# Altium PCB 底板模版.PcbDoc
Units mm, origin at the board's own origin, x right, y up, seen from the top; angles counter-clockwise.
Board outline 122.4 x 87.4 mm, 2 copper layers (Top Layer, Bottom Layer); 29 components, 112 nets, 147 pads, 9 vias.
Unrouted connection lines stored in the file: 38.
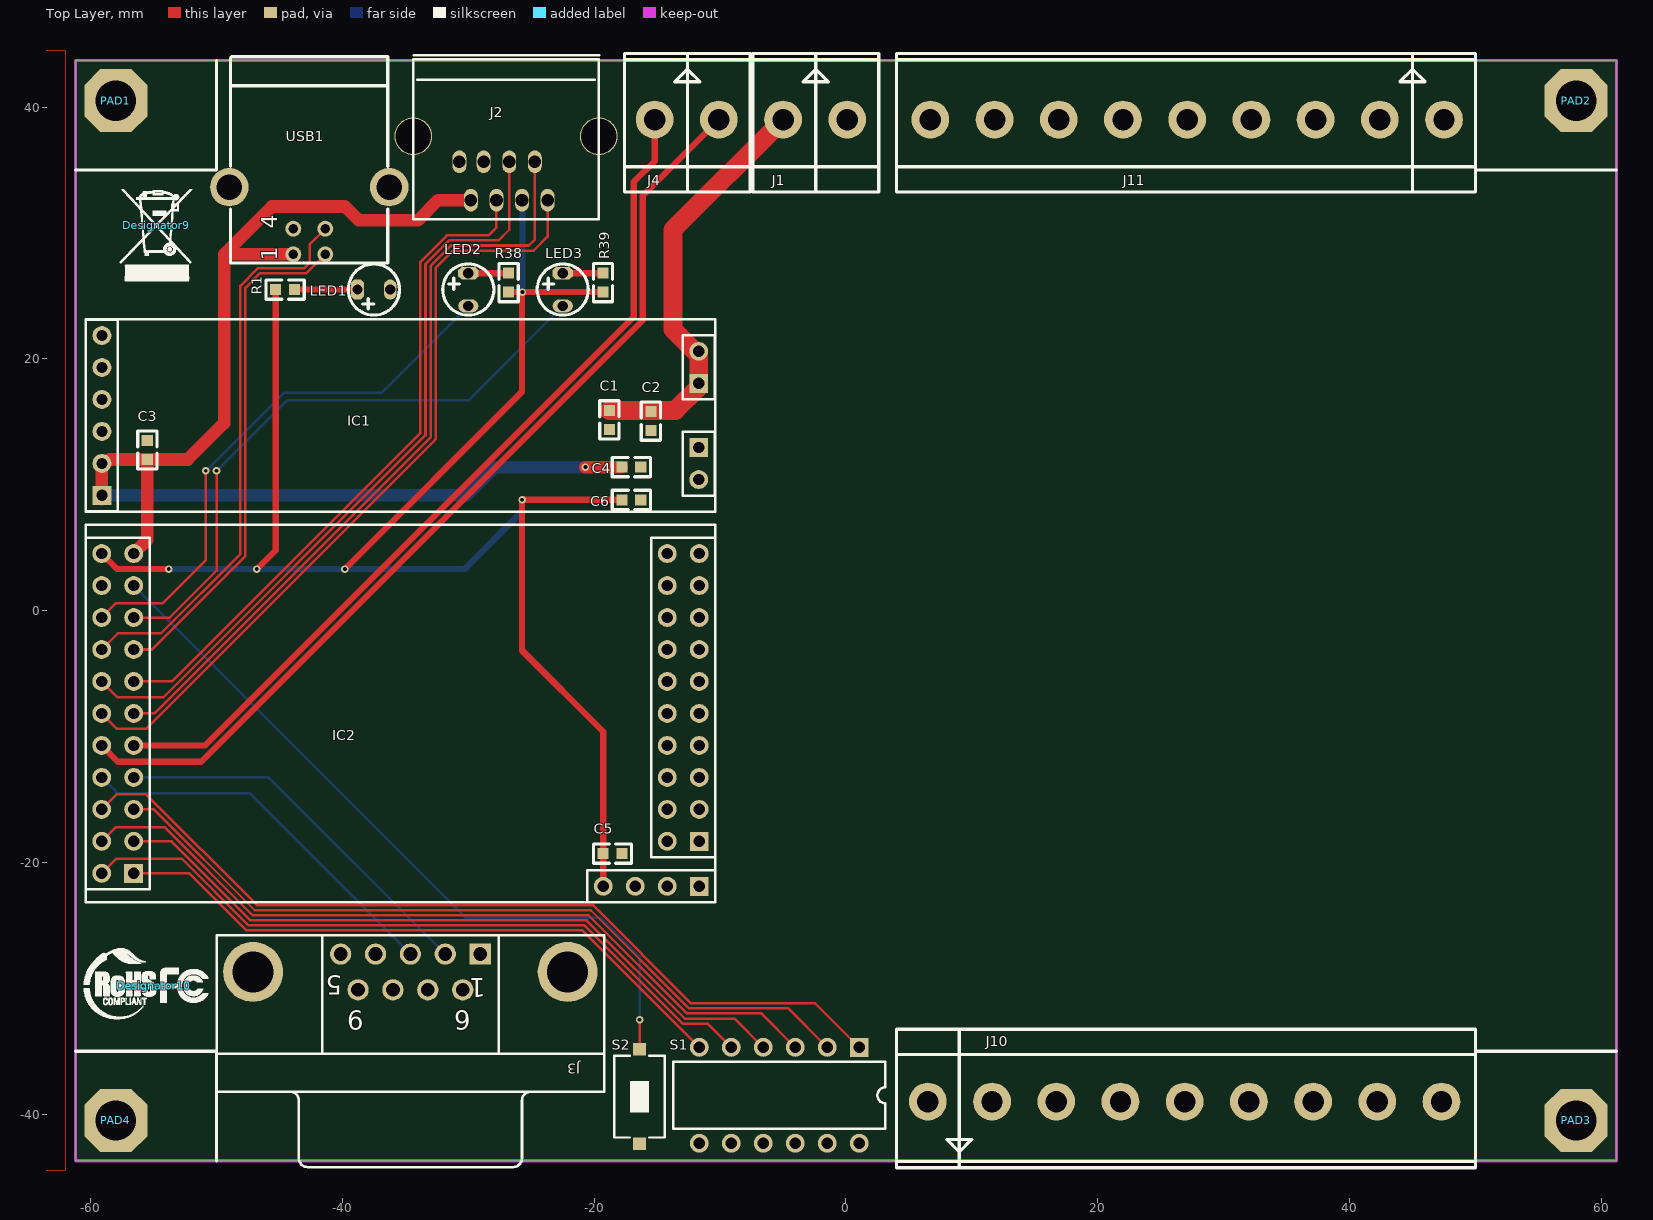
[diagram p0: Top Layer view]
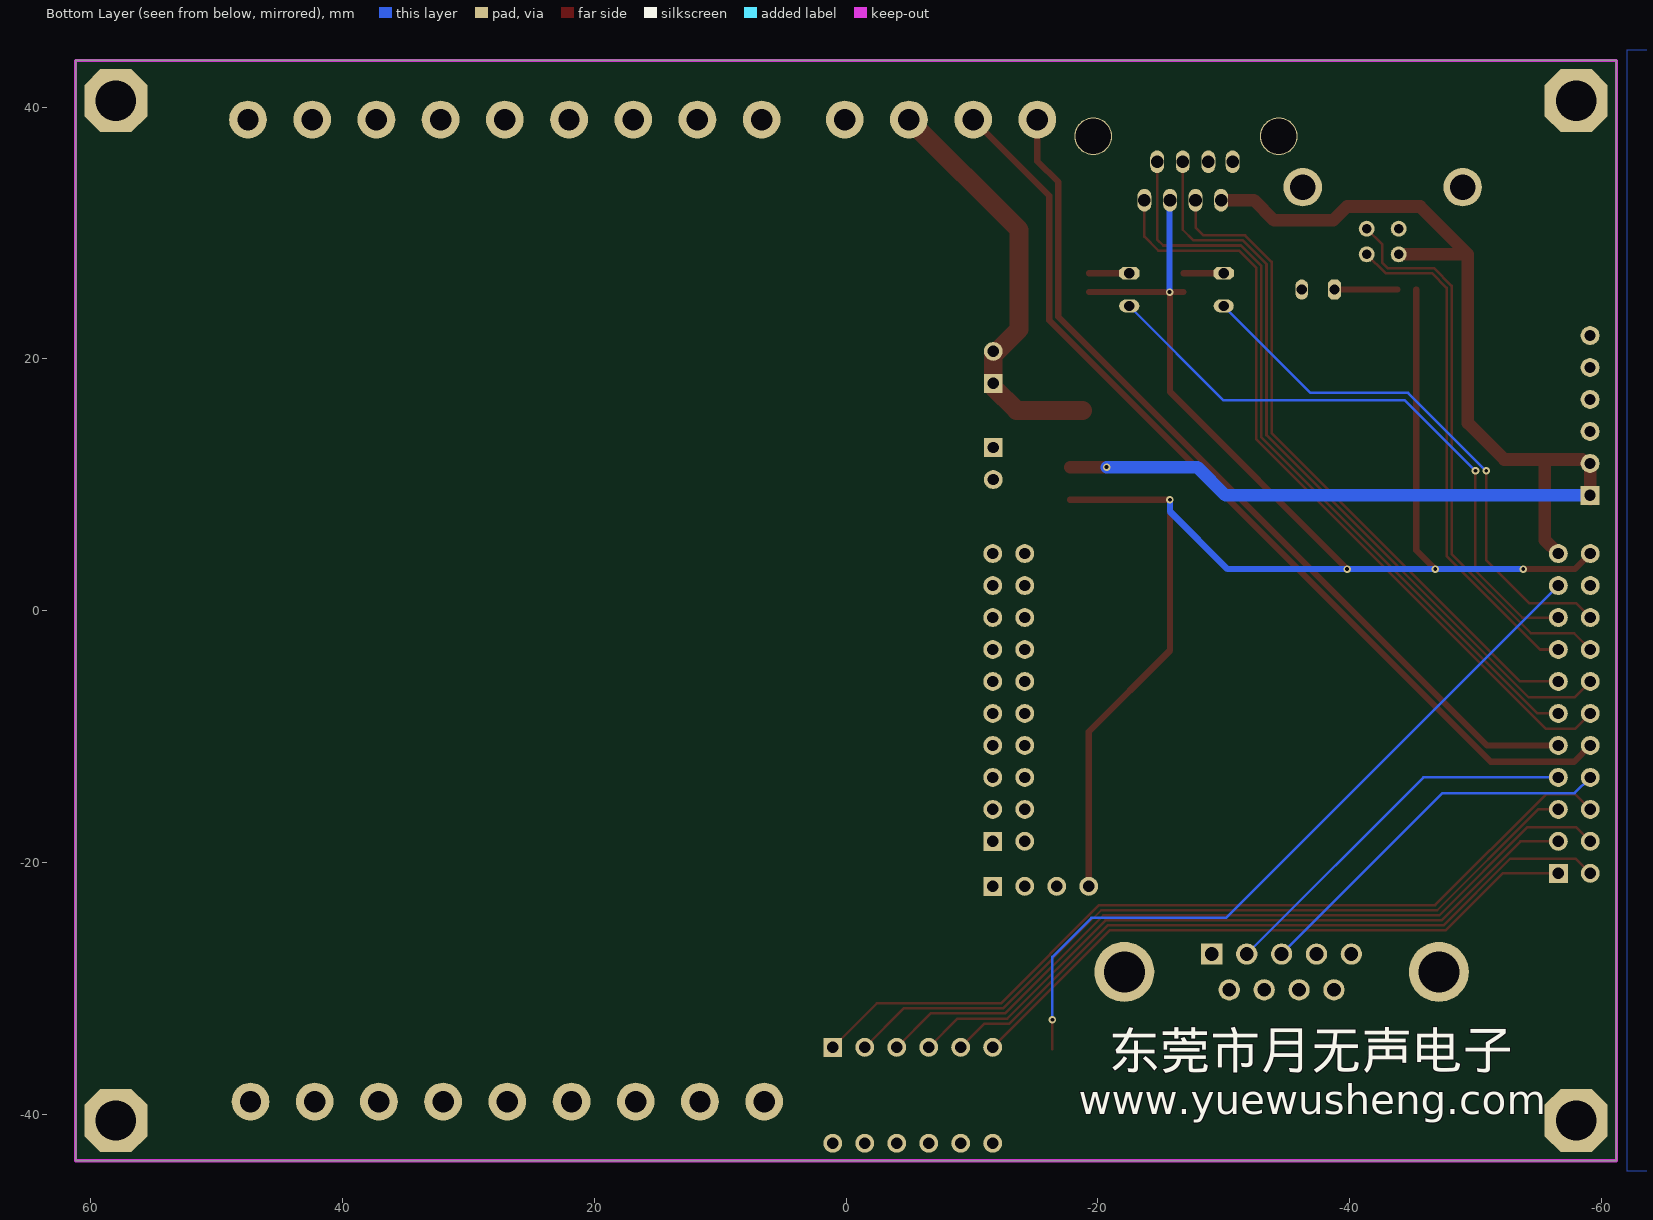
[diagram p1: Bottom Layer view, seen from below]

## Layer stack, top to bottom
Top Layer: signal copper 0.0356
Dielectric: dielectric 0.32, FR-4, Dk 4.8
Bottom Layer: signal copper 0.0356

## Board outline
-61.2,-43.7 61.2,-43.7 61.2,43.7 -61.2,43.7

## Design rules (kind name [scope] priority, off if disabled: settings)
Clearance [(InPadClass('All Pads')) vs InPolygon] p1: gap=0.3
Clearance Clearance_1 [All] p2: gap=0.2
ComponentClearance [All] p1 off: gap=0.254 collisioncheckmode=3 verticalgap=0.254 showdistances=FALSE
PlaneConnect [All] p1: planeconnectstyle=Relief reliefexpansion=0 reliefentries=4 reliefconductorwidth=0.3 reliefairgap=0.508
PolygonConnect PolygonConnect_1 [All vs IsComponentPad] p1: connectstyle=Relief reliefconductorwidth=0.3 reliefentries=4 polygonreliefangle="90 Angle" airgapwidth=0.3
PolygonConnect [All] p2: connectstyle=Direct reliefconductorwidth=0.3 reliefentries=4 polygonreliefangle="90 Angle" airgapwidth=0.3
RoomDefinition 1、八进八出 [InComponentClass('1、八进八出')] p1: confinementstyle=ConfineIn formatcopy=TRUE lockcomponents=FALSE outline -12,23.5 -12,28 3.5,28 3.5,46.6 62,46.6 62,-46.8 3.5,-46.8 3.5,-28 -12,-28 -12,-23.5 -9,-23.5 -9,23.5
RoomDefinition 公共电路 [InComponentClass('公共电路')] p2: confinementstyle=ConfineIn formatcopy=TRUE lockcomponents=FALSE outline -62,-44.5 3.5,-44.5 3.5,-43.7 61.2,-43.7 61.2,43.7 50,43.7 50,35 61.2,35 61.2,-35 50,-35 50,-43.7 3.5,-43.7 3.5,-28 -12,-28 -12,-23.5 -9.5,-23.5 -9.5,23.5 -12,23.5 -12,28 3.5,28 3.5,44.5 -62,44.5
RoutingVias [All] p1: holewidth=0.3 width=0.6 viastyle="Through Hole" minholewidth=0.3 minwidth=0.6 maxholewidth=0.3 maxwidth=0.6
SolderMaskExpansion [All] p1: expansion=0.102
Width [All] p1: maxlimit=2 minlimit=0.16 preferedwidth=0.2 minimp=50.000000 maximp=50.000000 favimp=50.000000
26 further rules are at their usual default settings.

## Classes and differential pairs
component class 1、八进八出: J10 J11
component class 公共电路: C1 C2 C3 C4 C5 C6 Designator9 Designator10 IC1 IC2 J1 J2 J3 J4 LED1 LED2 LED3 PAD1 PAD2 PAD3 PAD4 R1 R38 R39 S1 S2 usb1

## Components (designator, comment, footprint, x,y, rotation, side; value= is the part's Value field where it differs from the comment)
C1 "104" 0603A -18.8,15.9 r270 top
C2 "104" 0603A -15.5,15.8 r270 top
C3 "104" 0603A -55.5,12 r90 top
C4 "104" 0603A -17.8,11.4 r0 top
C5 "104" 0603A -19.3,-19.3 r0 top
C6 "104" 0603A -17.8,8.8 r0 top
Designator9 "" HS -54.8,30.6 r0 top
Designator10 "" fc -55,-29.8 r0 top
IC1 "扩展模块电源板" 扩展模块电源板 -35.4,15.5 r180 top
IC2 "扩展模块核心板" 扩展模块核心板 -35.4,-8.2 r0 top
J1 "CON2" CON2*5.1 0.1,39 r0 top
J2 "CON8" "od-rj45 - duplicate" -23.7,32.6 r180 top
J3 "D Connector 9" DSUB1.385-2H9 -34.6,-38.2 r180 top
J4 "CON2" CON2*5.1 -10.1,39 r0 top
J10 "CON9" CON9*5.1 6.5,-39 r180 top
J11 "CON9" CON9*5.1 47.5,39 r0 top
LED1 "LED" LED2.5 -37.5,25.5 r180 top
LED2 "LED" LED2.5 -30,25.5 r90 top
LED3 "LED" LED2.5 -22.5,25.5 r90 top
PAD1 "PAD" PAD -58,40.5 r0 top
PAD2 "PAD" PAD 58,40.5 r0 top
PAD3 "PAD" PAD 58,-40.5 r0 top
PAD4 "PAD" PAD -58,-40.5 r0 top
R1 "160" 0603A -45.3,25.5 r0 top
R38 "160" 0603A -26.8,25.3 r90 top
R39 "160" 0603A -19.3,25.3 r90 top
S1 "SW DIP-6" DIP-12/SW -5.3,-38.5 r180 top
S2 "RESRT" SW-PB2 -16.4,-38.6 r270 top
USB1 "USB" USB-B3 -43.9,28.3 r90 top

## Footprints (in the part's own frame and the unit in brackets; to place one, negate y for a bottom-side part, rotate by r counter-clockwise, add the part's x,y. Pads: shape width x height; smd on the part's side, far side on the other; paste and mask are expansions set on the pad)
0603A [mm]
  rect 0.88x0.88 smd: 1(0,0) 2(1.5,0)
  silkscreen extent -0.76,-0.76 2.26,0.76
CON2*5.1 [mm]
  round 3 hole 1.7: 1(0,0) 2(-5.1,0)
  silkscreen extent -7.5,-5.75 2.5,5.25
CON9*5.1 [mm]
  round 3 hole 1.7: 1(0,0) 2(-5.1,0) 3(-10.2,0) 4(-15.3,0) 5(-20.4,0) 6(-25.5,0) 7(-30.6,0) 8(-35.7,0) 9(-40.8,0)
  silkscreen extent -43.5,-5.75 2.5,5.25
DIP-12/SW [mm] "DIP Switch; 12 Leads"
  rect 1.5x1.5 hole 0.9: 1(-6.35,-3.81)
  round 1.5 hole 0.9: 2(-3.81,-3.81) 3(-1.27,-3.81) 4(1.27,-3.81) 5(3.81,-3.81) 6(6.35,-3.81) 7(6.35,3.81) 8(3.81,3.81) 9(1.27,3.81) 10(-1.27,3.81) 11(-3.81,3.81) 12(-6.35,3.81)
  silkscreen extent -8.43,-2.65 8.41,2.65
DSUB1.385-2H9 [mm] "Connector; D Subminiature; 9 Position; Right Angle; Pitch 1.385 mm"
  rect 1.69x1.69 hole 1.09: 1(-5.54,-10.92)
  round 1.69 hole 1.09: 2(-2.77,-10.92) 3(0,-10.92) 4(2.77,-10.92) 5(5.54,-10.92) 6(-4.155,-8.08) 7(-1.385,-8.08) 8(1.385,-8.08) 9(4.155,-8.08)
  round 4.76 hole 3.26: 10(-12.495,-9.5) 11(12.495,-9.5)
  silkscreen extent -15.4,-12.4 15.4,6
fc [mm]
  silkscreen extent -5.53,-2.62 4.36,3
HS [mm]
  silkscreen extent -2.87,-4.39 2.87,2.87
LED2.5 [mil]
  oct 40x63 hole 32: A(51.18,0)
  oval 40x63 hole 32: K(-51.18,0)
  silkscreen extent -80,-80 80,80
"od-rj45 - duplicate" [mm]
  oval 1.1x1.8 hole 1: 1(0,0) 2(1.016,-3.048) 3(2.032,0) 4(3.048,-3.048) 5(4.064,0) 6(5.08,-3.048) 7(6.096,0) 8(7.012,-3.048)
  round 3 hole 2.8: 8(-4.064,-5.08) 8(10.668,-5.08)
  silkscreen extent -4.1,-11.53 10.67,1.52
PAD [mm]
  oct 5x5 hole 3.2: 1(0,0)
SW-PB2 [mm]
  rect 1x1 smd: 1(-3.75,0) 2(3.75,0)
  silkscreen extent -3.25,-2 3.25,2
USB-B3 [mil]
  round 50 hole 30: 1(0,0) 2(0,-100) 3(80,-100) 4(80,0)
  round 120 hole 80: 5(210,200) 6(210,-300)
  silkscreen extent -28,-295 618,197
扩展模块核心板 [mm]
  rect 1.5x1.5 hole 0.9: 1(-21.18,-12.67) 42(23.74,-10.13) 43(23.74,-13.7)
  round 1.5 hole 0.9: 2(-23.72,-12.67) 3(-21.18,-10.13) 4(-23.72,-10.13) 5(-21.18,-7.59) 6(-23.72,-7.59) 7(-21.18,-5.05) 8(-23.72,-5.05) 9(-21.18,-2.51) 10(-23.72,-2.51) 11(-21.18,0.03) 12(-23.72,0.03) 13(-21.18,2.57) 14(-23.72,2.57) 15(-21.18,5.11) 16(-23.72,5.11) 17(-21.18,7.65) 18(-23.72,7.65) 19(-21.18,10.19) 20(-23.72,10.19) 21(-21.18,12.73) 22(-23.72,12.73) 23(21.2,12.73) 24(23.74,12.73) 25(21.2,10.19) 26(23.74,10.19) 27(21.2,7.65) 28(23.74,7.65) 29(21.2,5.11) 30(23.74,5.11) 31(21.2,2.57) 32(23.74,2.57) 33(21.2,0.03) 34(23.74,0.03) 35(21.2,-2.51) 36(23.74,-2.51) 37(21.2,-5.05) 38(23.74,-5.05) 39(21.2,-7.59) 40(23.74,-7.59) 41(21.2,-10.13) 44(21.2,-13.7) 45(18.66,-13.7) 46(16.12,-13.7)
  silkscreen extent -24.99,-14.97 25.01,15.03
扩展模块电源板 [mm]
  round 1.5 hole 0.9: 1(-23.7,-5.09) 2(-23.7,5.09) 3(23.7,3.81) 4(23.7,-1.27) 4(23.7,1.27) 5(23.7,-6.35) 5(23.7,-3.81)
  rect 1.5x1.5 hole 0.9: 1(-23.7,-2.55) 2(-23.7,2.55) 3(23.7,6.35)
  silkscreen extent -25,-7.65 25,7.65

## Part data
C1 C2 C3 C4 C5 C6: library part CAP, "Capacitor"
Designator9 Designator10: library part PAD
J3: "Receptacle Assembly, 9 Position, Right Angle"
R1 R38 R39: library part RES2
S1: "DIP Switch, 6 Position, SPST"
S2: library part SW-PB
USB1: library part "HEADER 3X2"

## Via types
v1: diameter 0.6, hole 0.3, Top Layer to Bottom Layer, 9 vias

## Nets (pads, with @x,y where several pads share a name; then routed paths per layer and width w, separated by ;. In a path a pad name is that pad's centre, name@x,y a point inside that pad or via, vN(x,y) a via of type N, cw(c..) or ccw(c..) an arc to the next point about the centre after c; other vN are vias at no path point)
485A: IC2.10 J4.1 | length 76.7
  Top Layer w0.5: IC2.10 -57.83,-12 -51.21,-12 -16.15,23.06 -16.15,32.95 J4.1 ; IC2.10@-59.12,-10.41 IC2.10@-58.97,-10.56
485B: IC2.9 J4.2 | length 70.2
  Top Layer w0.5: IC2.9 -50.91,-10.71 -16.85,23.35 -16.85,34.05 -15.2,35.7 J4.2
+3.3V: C5.1 C6.1 IC2.22 IC2.46 J2.3 R1.1 R38.1 R39.1 | length 143.7
  Top Layer w0.5: IC2.22 -57.89,3.3 v1(-53.8,3.3) ; IC2.22@-59.12,4.83 IC2.22@-58.97,4.68 ; v1(-46.8,3.3) -45.3,4.8 R1.1 ; v1(-39.8,3.3) -25.732,17.368 -25.732,25.268 v1(-25.7,25.3) ; R38.1 v1(-25.7,25.3) ; R39.1 v1(-25.7,25.3) ; IC2.46 -19.28,-9.62 -25.732,-3.168 v1(-25.732,8.8) C6.1
  Bottom Layer w0.5: v1(-53.8,3.3) v1(-46.8,3.3) v1(-39.8,3.3) -30.3,3.3 -25.732,7.868 v1(-25.732,8.8) ; J2.3 -25.7,32.568 v1(-25.7,25.3)
+5V: C3.1 C4.1 IC1.3 IC2.21 J2.7 USB1.1 | length 105
  Top Layer w1: IC1.3@-59.1,8.85 -59.1,9.15 -59.1,11.39 -58.49,12 C3.1 ; IC2.21 -55.5,5.61 C3.1 ; USB1.1 -49.4,28.3 ; J2.7 -32.4,32.6 -34,31 -38.7,31 -39.8,32.1 -45.6,32.1 -49.4,28.3 ; v1(-20.7,11.4) C4.1 ; C3.1 -52.3,12 -49.4,14.9 -49.4,28.3
  Bottom Layer w1: IC1.3@-59.1,9.15 -30.15,9.15 -27.9,11.4 v1(-20.7,11.4)
GND: C1.2 C2.2 C3.2 C4.2 C5.2 C6.2 IC1.2 IC1.4 IC2.20 IC2.23 IC2.42 IC2.43 J1.1 J2.6 J2.8 J3.5 J3.10 J3.11 J10.9 J11.1 LED1.K PAD1.1 PAD2.1 PAD3.1 PAD4.1 S1.7 S1.8 S1.9 S1.10 S1.11 S1.12 S2.2 USB1.4 USB1.5 USB1.6
INPUT1: J10.1
INPUT2: J10.2
INPUT3: J10.3
INPUT4: J10.4
INPUT5: J10.5
INPUT6: J10.6
INPUT7: J10.7
INPUT8: J10.8
NetD10_A: 
NetD10_K: 
NetD11_A: 
NetD11_K: 
NetD12_A: 
NetD12_K: 
NetD13_A: 
NetD13_K: 
NetD14_A: 
NetD14_K: 
NetD15_A: 
NetD15_K: 
NetD16_A: 
NetD16_K: 
NetD17_A: 
NetD17_K: 
NetLED1_A: LED1.A R1.2 | length 5
  Top Layer w0.5: R1.2 LED1.A
NetLED2_A: LED2.A R38.2 | length 3.2
  Top Layer w0.5: LED2.A R38.2
NetLED3_A: LED3.A R39.2 | length 3.2
  Top Layer w0.5: LED3.A R39.2
NetLED10_A: 
NetLED11_A: 
NetLED12_A: 
NetLED13_A: 
NetLED14_A: 
NetLED15_A: 
NetLED16_A: 
NetLED17_A: 
NetLED30_A: 
NetLED31_A: 
NetLED32_A: 
NetLED33_A: 
NetLED34_A: 
NetLED35_A: 
NetLED36_A: 
NetLED37_A: 
NetR21_1: 
NetR22_1: 
NetR23_1: 
NetR24_1: 
NetR25_1: 
NetR26_1: 
NetR27_1: 
NetR28_1: 
NetR49_1: 
NetR70_2: 
NetR71_2: 
NetR72_2: 
NetR73_2: 
NetR74_2: 
NetR75_2: 
NetR76_2: 
NetR77_2: 
NetR89_1: 
NRST: IC2.19 S2.1 | length 59.7
  Top Layer w0.2: S2.1 v1(-16.4,-32.5)
  Bottom Layer w0.2: IC2.19 -30.19,-24.4 -19.5,-24.4 -16.4,-27.5 v1(-16.4,-32.5)
OUTPUT1: J11.2
OUTPUT2: J11.3
OUTPUT3: J11.4
OUTPUT4: J11.5
OUTPUT5: J11.6
OUTPUT6: J11.7
OUTPUT7: J11.8
OUTPUT8: J11.9
PA0: IC2.25
PA1: IC2.24
PA4: IC2.26
PA5: IC2.27
PA6: IC2.28
PA7: IC2.29
PA8: IC2.41
PA13: IC2.14 J2.4 | length 61.6
  Top Layer w0.2: IC2.14 -57.85,-6.9 -54.231,-6.9 -33.4,13.931 -33.4,27.531 -31.531,29.4 -27.6,29.4 -26.748,30.252 J2.4
PA14: IC2.13 J2.5 | length 53.9
  Top Layer w0.2: IC2.13 -53.527,-5.63 -33.8,14.097 -33.8,27.697 -31.697,29.8 -28.4,29.8 -27.764,30.436 J2.5
PB0: IC2.32
PB1: IC2.33
PB8: IC2.6 S1.1 | length 69
  Top Layer w0.2: IC2.6 -57.93,-14.6 -55.6,-14.6 -46.8,-23.4 -20.112,-23.4 -12.312,-31.2 -2.44,-31.2 S1.1
PB13: IC2.34
PB14: IC2.35
PB15: IC2.36
PC0: IC2.1 S1.6 | length 50.7
  Top Layer w0.2: IC2.1 -52.158,-20.87 -47.628,-25.4 -20.94,-25.4 S1.6
PC1: IC2.2 S1.5 | length 56.7
  Top Layer w0.2: IC2.2 -57.95,-19.7 -52.763,-19.7 -47.463,-25 -20.774,-25 -12.974,-32.8 -11,-32.8 S1.5
PC2: IC2.3 S1.4 | length 56.8
  Top Layer w0.2: IC2.3 -53.567,-18.33 -47.297,-24.6 -20.609,-24.6 -12.809,-32.4 -8.86,-32.4 S1.4
PC3: IC2.4 S1.3 | length 62.8
  Top Layer w0.2: IC2.4 -57.99,-17.2 -54.131,-17.2 -47.131,-24.2 -20.443,-24.2 -12.643,-32 -6.72,-32 S1.3
PC4: IC2.30
PC5: IC2.31
PC6: IC2.37
PC7: IC2.38
PC8: IC2.39
PC9: IC2.40
PC10: IC2.45
PC11: IC2.44
PC12: IC2.17 LED3.K | length 49
  Top Layer w0.2: IC2.17 -53.716,-0.55 -50,3.166 v1(-50,11.1)
  Bottom Layer w0.2: v1(-50,11.1) -44.4,16.7 -30,16.7 LED3.K
PC13: IC2.5 S1.2 | length 62.9
  Top Layer w0.2: IC2.5 -54.976,-15.79 -46.966,-23.8 -20.277,-23.8 -12.477,-31.6 -4.58,-31.6 S1.2
PD2: IC2.18 LED2.K | length 43.5
  Top Layer w0.2: IC2.18 -57.97,0.6 -54.266,0.6 -50.849,4.017 v1(-50.849,11.1)
  Bottom Layer w0.2: v1(-50.849,11.1) -44.649,17.3 -36.9,17.3 LED2.K
RJ45_RX: IC2.11 J2.2 | length 61.6
  Top Layer w0.2: IC2.11 -54.936,-8.17 -33,13.766 -33,27.366 -31.366,29 -25.2,29 -24.716,29.484 J2.2
RJ45_TX: IC2.12 J2.1 | length 63
  Top Layer w0.2: IC2.12 -57.89,-9.4 -55.6,-9.4 -32.6,13.6 -32.6,27.2 -31.2,28.6 -24.8,28.6 -23.7,29.7 J2.1
RS232_RX: IC2.7 J3.2 | length 30.6
  Bottom Layer w0.2: IC2.7 -45.86,-13.25 J3.2
RS232_TX: IC2.8 J3.3 | length 30.3
  Bottom Layer w0.2: IC2.8 -57.87,-14.5 -47.38,-14.5 J3.3
USB_D+: IC2.16 USB1.3 | length 44.9
  Top Layer w0.2: IC2.16 -57.83,-1.8 -54.4,-1.8 -48.1,4.5 -48.1,25.8 -46.7,27.2 -43.026,27.2 -42.6,27.626 -42.6,29.092 USB1.3
USB_D-: IC2.15 USB1.2 | length 40.7
  Top Layer w0.2: IC2.15 -55.124,-3.09 -47.7,4.334 -47.7,25.634 -46.534,26.8 -42.86,26.8 USB1.2
VCC: C1.1 C2.1 IC1.1 J1.2 | length 33.6
  Top Layer w1.5: C1.1 -13.55,15.9 -11.7,17.75 -11.7,20.29 -13.755,22.345 -13.755,30.245 J1.2
pads on no net: IC1.5 J3.1 J3.4 J3.6 J3.7 J3.8 J3.9

## Polygon pours and split planes (outlines as drawn)
GND on Top Layer "Bottom Layer-No Net" (solid, remove dead copper, pour order 4): -62,44.5 -62,-44.5 -66.4,-44.5 -66.4,44.5
GND on Bottom Layer "Bottom Layer-No Net" (solid, remove dead copper, pour order 3): -62,44.5 -62,-44.5 -65.4,-44.5 -65.4,44.5

## Keep-outs
Keep-Out Layer:
  the board outline again, w0.254

## Silkscreen, mask and mechanical layers (free items; w line width, h text height)
Top Overlay:
  lines w0.254: -61.2,-35 -50,-35 -50,-43.7 ; -61.2,35 -50,35 -50,43.7 ; 50,-43.7 50,-35 61.2,-35 ; 50,43.7 50,35 61.2,35
Bottom Overlay:
  text "东莞市月无声电子" at -20.9,-37.3 h5
  text "www.yuewusheng.com" at -18.5,-40.8 h4

## Dimensions
-61.2,43.7 to -61.2,-43.7 on Top Overlay
-61.2,-43.7 to 61.2,-43.7 on Top Overlay
-50,43.7 to 50,43.7 on Top Overlay
-61.2,35 to -61.2,-35 on Top Overlay

## Text inside footprints (layer, text, board x,y; h text height)
J3: Top Overlay "6" at -29.8,-31.8 h1.5 r180; Top Overlay "9" at -38.3,-31.8 h1.5 r180; Top Overlay "5" at -40,-29 h1.5 r180; Top Overlay "1" at -28.6,-29.2 h1.5 r180
USB1: Top Overlay "1" at -45.17,27.792 h1.27 r90; Top Overlay "4" at -45.17,30.332 h1.27 r90